# Altium PCB lcdRGB.PcbDoc
Units mm, origin at the board's own origin, x right, y up, seen from the top; angles counter-clockwise.
Board outline 87.25 x 52.83 mm, 2 copper layers (Top Layer, Bottom Layer); 14 components, 40 nets, 148 pads, 51 vias.
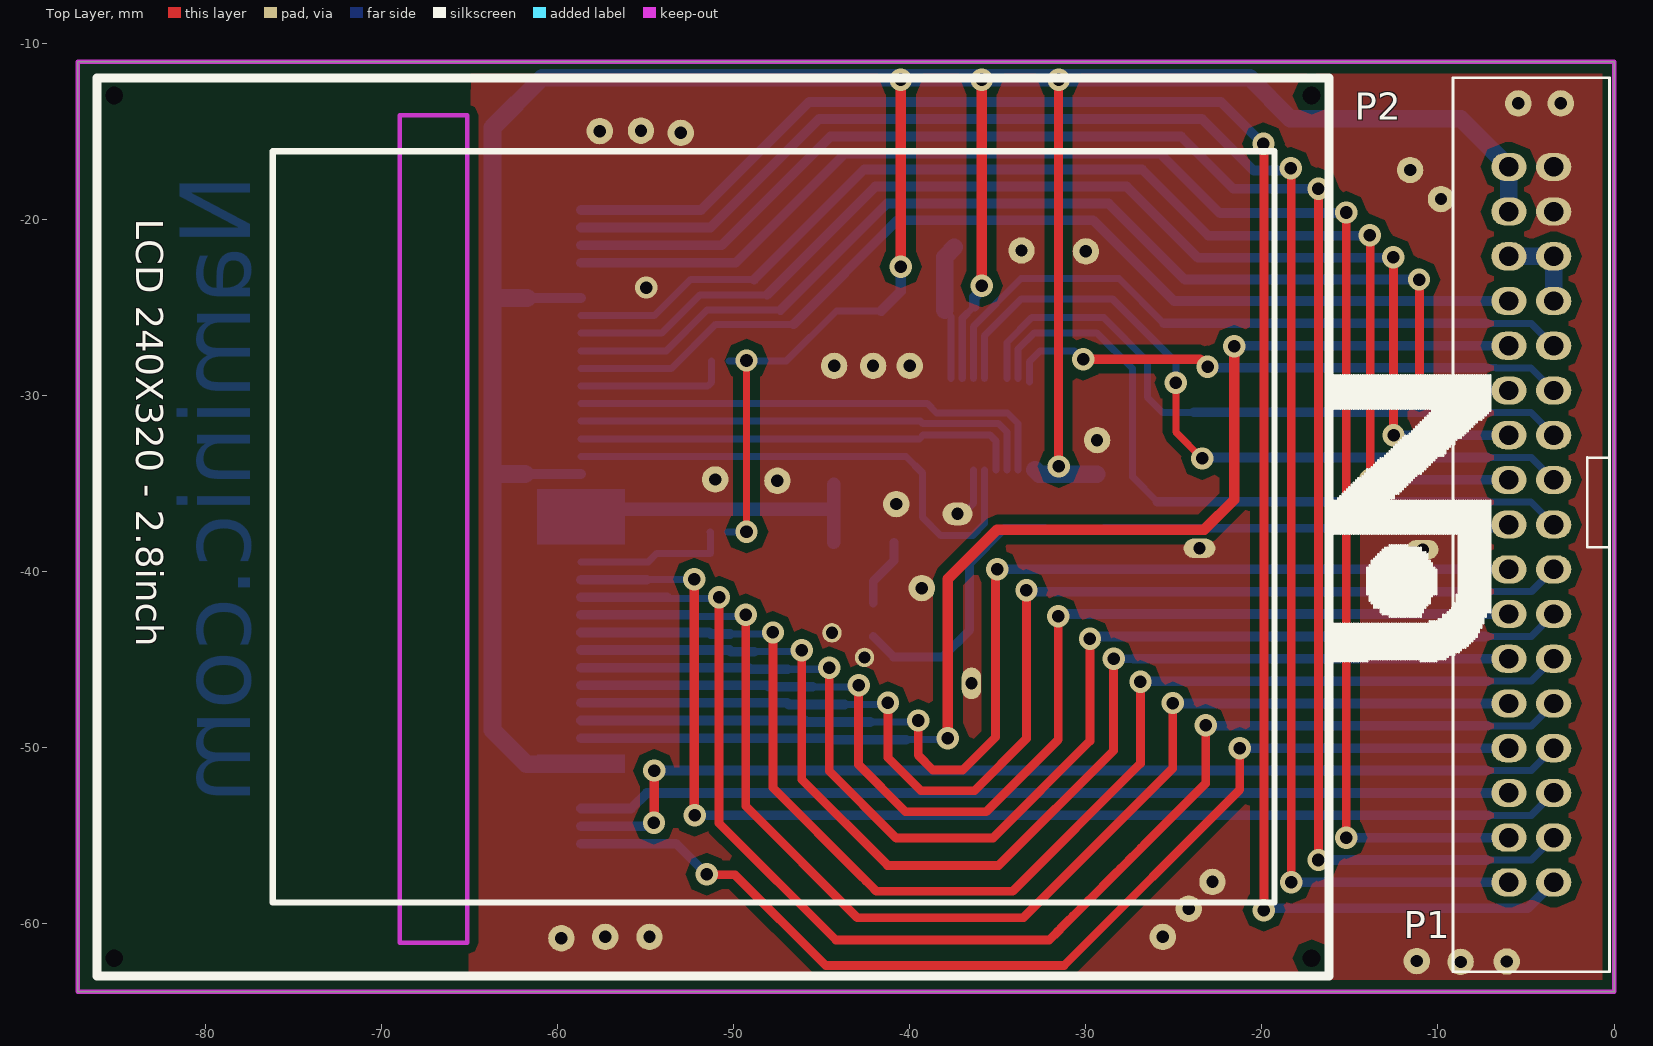
[diagram p0: Top Layer view]
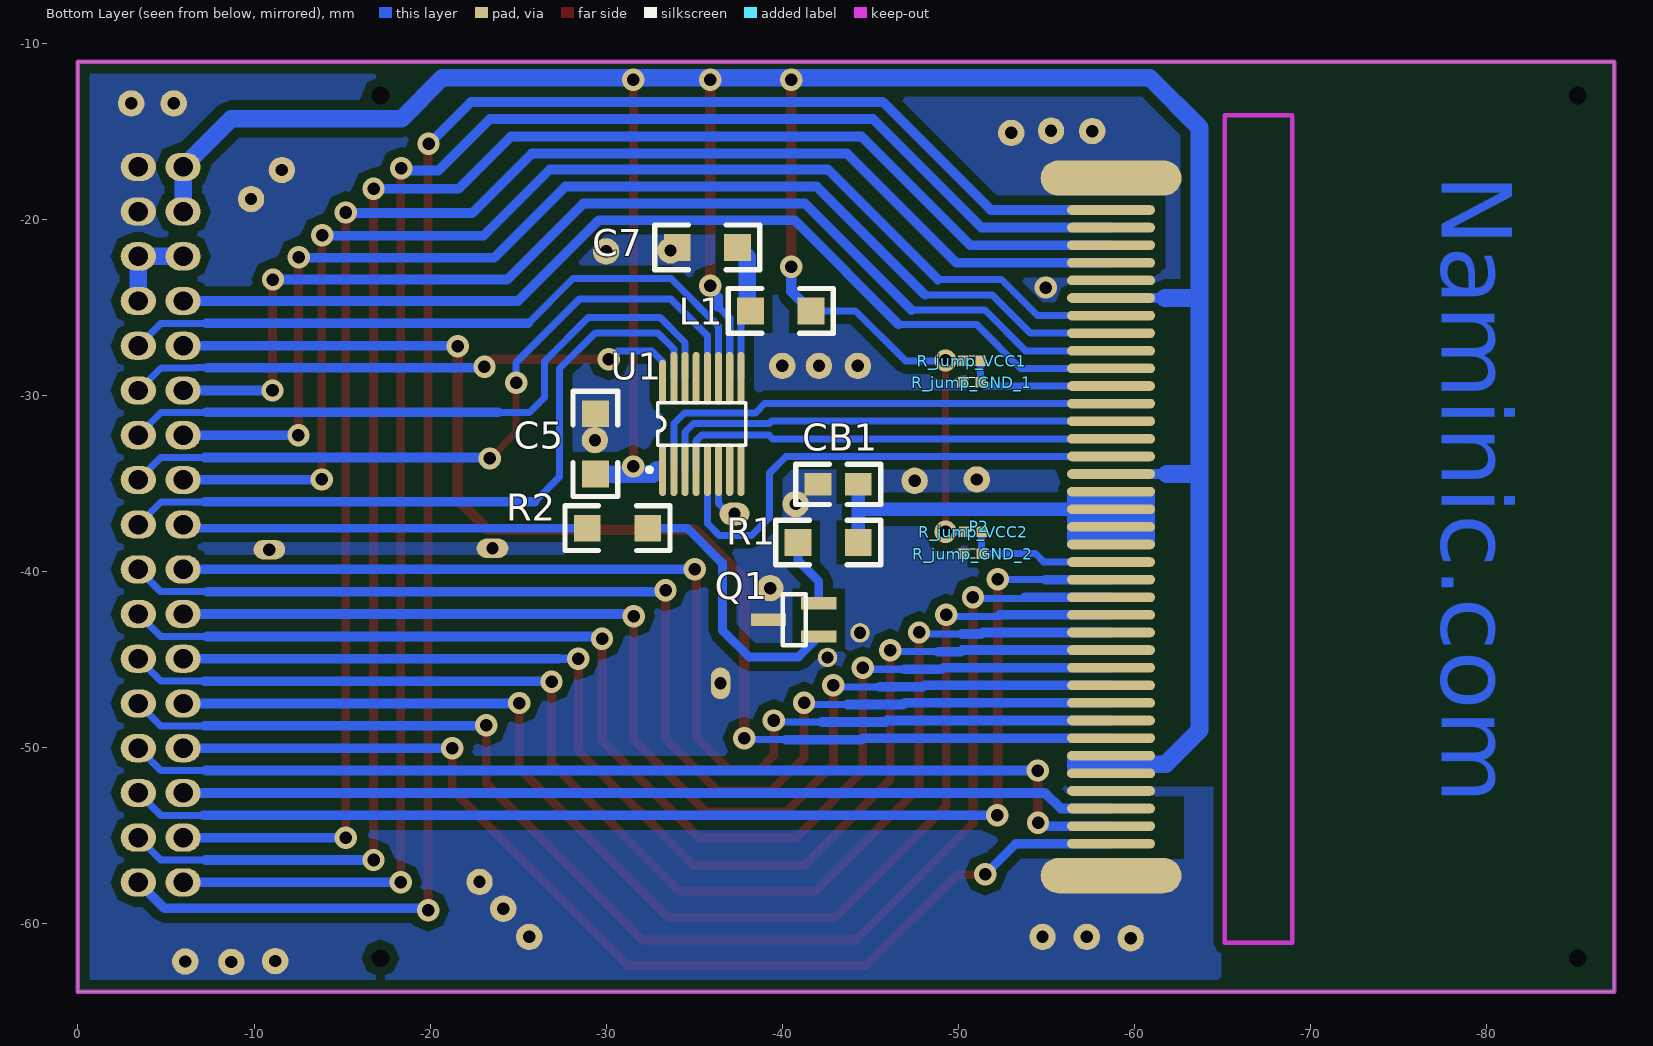
[diagram p1: Bottom Layer view, seen from below]

## Layer stack, top to bottom
Top Layer: signal copper 0.0356
Dielectric: dielectric 0.32, FR-4, Dk 4.8
Bottom Layer: signal copper 0.0356

## Board outline
-87.249,-11.049 0,-11.049 0,-63.881 -87.249,-63.881

## Design rules (kind name [scope] priority, off if disabled: settings)
Clearance [InPolygon] p1: gap=0.5
ComponentClearance [All] p1: gap=0.2 collisioncheckmode=3 verticalgap=0.2 showdistances=FALSE
FabricationTestpoint [(IsPad And (OnTopLayer Or OnBottomLayer))] p1: side=3 testpointundercomponent=TRUE minsize=1.016 maxsize=2.54 preferedsize=1.524 minholesize=0 maxholesize=1.016 preferedholesize=0.813 testpointgrid=0.025 allowsidetop=TRUE allowsidebottom=TRUE usegrid=TRUE gridtolerance=0
HoleSize [All] p1: absolutevalues=TRUE maxlimit=2.54 minlimit=0.7 maxpercent=80.000 minpercent=20.000
MinimumSolderMaskSliver [All] p1: minsoldermaskwidth=0
PlaneConnect [All] p1: planeconnectstyle=Direct reliefexpansion=0.508 reliefentries=4 reliefconductorwidth=0.254 reliefairgap=0.254
PolygonConnect [All] p1: connectstyle=Direct reliefconductorwidth=0.254 reliefentries=4 polygonreliefangle="90 Angle"
RoutingVias [All] p1: holewidth=0.711 width=1.27 viastyle="Through Hole" minholewidth=0.711 minwidth=1.27 maxholewidth=0.711 maxwidth=1.27
SilkToSilkClearance [All] p1: silktosilkclearance=0
SilkscreenOverComponentPads [IsPad] p1: minsilkscreentomaskgap=0
SolderMaskExpansion [All] p1: expansion=0
Width "Schematic Width Constraint_2" [InNet('+3.3A')] p1: maxlimit=1 minlimit=0.508 preferedwidth=0.508 minimp=50.000000 maximp=50.000000 favimp=50.000000
Width "Schematic Width Constraint_1" [InNet('EN')] p2: maxlimit=1 minlimit=0.508 preferedwidth=0.508 minimp=50.000000 maximp=50.000000 favimp=50.000000
Width "Schematic Width Constraint" [InNet('+5')] p3: maxlimit=1 minlimit=0.508 preferedwidth=0.508 minimp=50.000000 maximp=50.000000 favimp=50.000000
Width [All] p4: maxlimit=1 minlimit=0.4 preferedwidth=0.55 minimp=50.000000 maximp=50.000000 favimp=50.000000
21 further rules are at their usual default settings.

## Components (designator, comment, footprint, x,y, rotation, side; value= is the part's Value field where it differs from the comment)
C5 "100nF" 1206 -29.388,-34.468 r90 bottom
C7 "100nF" 1206 -37.465,-21.59 r0 bottom
CB1 "Circuit Breaker" 0805 -42.037,-35.052 r180 bottom
L1 "Inductor" 1206 -41.631,-25.197 r0 bottom
P1 "Header 17X2" IDC34S -3.429,-57.658 r180 top
P2 "TFT LCD" LCD_COLOR28 -51.181,-37.465 r270 top locked
Q1 "MMBT2907" SOT-23 -40.03,-44.196 r90 bottom
R1 "10R" 1206 -40.894,-38.354 r180 bottom
R2 "2.7K" 1206 -32.36,-37.541 r0 bottom
R_jump_GND_1 "0" "RES 0402 (1005X04L)" -50.775,-29.261 r180 bottom
R_jump_GND_2 "0" "RES 0402 (1005X04L)" -50.825,-38.989 r180 bottom
R_jump_VCC1 "0" "RES 0402 (1005X04L)" -50.775,-28.042 r180 bottom
R_jump_VCC2 "0" "RES 0402 (1005X04L)" -50.851,-37.744 r180 bottom
U1 "ADS7843E" DBQ016 -35.433,-31.623 r180 bottom

## Footprints (in the part's own frame and the unit in brackets; to place one, negate y for a bottom-side part, rotate by r counter-clockwise, add the part's x,y. Pads: shape width x height; smd on the part's side, far side on the other; paste and mask are expansions set on the pad)
0805 [mil]
  rect 60x50 smd: 1(0,0) 2(90,0)
  silkscreen extent -50,-45 140,45, body extent -16,-23 107,25, height 39
1206 [mil]
  rect 60x60 smd: 1(0,0) 2(135,0)
  silkscreen extent -50,-50 185,50
DBQ016 [mm] "SSOP; 16 Leads; Body Width 3.9 mm; Pitch 0.635 mm"
  oval 0.4x3 smd: 1(-2.222,-2.6) 2(-1.587,-2.6) 3(-0.952,-2.6) 4(-0.317,-2.6) 5(0.318,-2.6) 6(0.953,-2.6) 7(1.588,-2.6) 8(2.223,-2.6) 9(2.223,2.6) 10(1.588,2.6) 11(0.953,2.6) 12(0.318,2.6) 13(-0.317,2.6) 14(-0.952,2.6) 15(-1.587,2.6)
  oval 0.4x2.5 smd: 16(-2.222,2.4)
  silkscreen extent -3.1,-2.72 2.5,1.2
IDC34S [mm]
  oval 2x1.6 hole 1.1: 1(0,0) 2(2.54,0) 3(0,-2.54) 4(2.54,-2.54) 5(0,-5.08) 6(2.54,-5.08) 7(0,-7.62) 8(2.54,-7.62) 9(0,-10.16) 10(2.54,-10.16) 11(0,-12.7) 12(2.54,-12.7) 13(0,-15.24) 14(2.54,-15.24) 15(0,-17.78) 16(2.54,-17.78) 17(0,-20.32) 18(2.54,-20.32) 19(0,-22.86) 20(2.54,-22.86) 21(0,-25.4) 22(2.54,-25.4) 23(0,-27.94) 24(2.54,-27.94) 25(0,-30.48) 26(2.54,-30.48) 27(0,-33.02) 28(2.54,-33.02) 29(0,-35.56) 30(2.54,-35.56) 31(0,-38.1) 32(2.54,-38.1) 33(0,-40.64) 34(2.54,-40.64)
  silkscreen extent -3.18,-45.7 5.72,5.08
LCD_COLOR28 [mm]
  oval 2x8 smd far side: 0(-19.812,-7.5) 0(19.812,-7.5)
  oval 0.55x5 smd far side: 1(-18,-7.5) 2(-17,-7.5) 3(-16,-7.5) 4(-15,-7.5) 5(-14,-7.5) 6(-13,-7.5) 7(-12,-7.5) 8(-11,-7.5) 9(-10,-7.5) 10(-9,-7.5) 11(-8,-7.5) 12(-7,-7.5) 13(-6,-7.5) 14(-5,-7.5) 15(-4,-7.5) 16(-3,-7.5) 17(-2,-7.5) 18(-1,-7.5) 19(0,-7.5) 20(1,-7.5) 21(2,-7.5) 22(3,-7.5) 23(4,-7.5) 24(5,-7.5) 25(6,-7.5) 26(7,-7.5) 27(8,-7.5) 28(9,-7.5) 29(10,-7.5) 30(11,-7.5) 31(12,-7.5) 32(13,-7.5) 33(14,-7.5) 34(15,-7.5) 35(16,-7.5) 36(17,-7.5) 37(18,-7.5)
  round 0 hole 1: 38(24.5,34) 39(-24.5,-34) 40(24.5,-34) 41(-24.5,34)
  Keep-Out Layer lines w0.254: 23.622,-17.78 23.622,-13.97 -23.368,-13.97 -23.368,-17.78 -23.114,-17.78 23.622,-17.78
  silkscreen extent -25.5,-35 25.5,35
"RES 0402 (1005X04L)" [mm] "Chip Resistor, 2-Leads, Body 1.0x0.5mm, IPC High Density _ (0.031/0.063 W)"
  rect 0.6x0.6 smd: 1(-0.5,0) 2(0.5,0)
  silkscreen extent -0.15,-0.25 0.15,0.25, body extent -0.51,-0.25 0.51,0.25, height 0.35
SOT-23 [mm]
  rect 0.7x2 smd: 1(2.4,-2.05) 2(0.5,-2.05) 3(1.45,0.81)
  silkscreen extent 0,-1.3 2.9,0

## Part data
C5 C7: library part "Cap Semi", "Capacitor (Semiconductor SIM Model)"
P1: "Header, 17-Pin, Dual row"
P2: library part TFTLCD
Q1: library part 2N3906, "PNP General Purpose Amplifier"
R1 R2: library part "Res Semi", "Semiconductor Resistor"
R_jump_GND_1 R_jump_GND_2 R_jump_VCC1 R_jump_VCC2: library part Resistor, "Resistor"
U1: "4-Wire Touch Screen Controller, 16-Pin SSOP, Pb-Free"

## Free pads (board coordinates)
  round 1.5 hole 0.7: 24(-22.809,-57.633) 25(-24.155,-59.157) 26(-25.629,-60.757) 27(-11.201,-62.128) 28(-8.712,-62.179) 29(-6.096,-62.154) 30(-5.436,-13.411) 31(-3.023,-13.411) 32(-9.83,-18.847) 33(-11.582,-17.196) 34(-29.997,-21.819) 36(-57.607,-14.986) 37(-55.27,-14.961) 38(-53.01,-15.088) 39(-59.792,-60.833) 40(-57.302,-60.757) 41(-54.788,-60.757) 44(-39.319,-40.945) 45(-40.767,-36.17) 47(-29.362,-32.537) 48(-40.005,-28.321) 49(-42.088,-28.321) 50(-44.298,-28.321) 51(-47.523,-34.849) 52(-51.054,-34.773) 53(-33.655,-21.768)
  oval 1.7x1.3 hole 0.7: 46(-37.287,-36.728)
  oval 1.8x1.1 hole 0.7: 55(-23.546,-38.684) 55(-10.871,-38.76)
  oval 1.1x1.8 hole 0.7: 56(-36.5,-46.355)
  round 1.1 hole 0.7: 57(-42.57,-44.882) 58(-44.425,-43.485)

## Via types
v1: diameter 1.27, hole 0.711, Top Layer to Bottom Layer, tented both sides, 50 vias
v2: diameter 1.27, hole 0.711, Top Layer to Bottom Layer, 1 vias

## Nets (pads, with @x,y where several pads share a name; then routed paths per layer and width w, separated by ;. In a path a pad name is that pad's centre, name@x,y a point inside that pad or via, vN(x,y) a via of type N, cw(c..) or ccw(c..) an arc to the next point about the centre after c; other vN are vias at no path point)
+3.3: C5.1 L1.1 P1.32 P1.34 P2.6 P2.16 P2.32 P2.33 R_jump_VCC1.1 R_jump_VCC2.1 U1.1 U1.10 | length 191
  Top Layer w0.4: v1(-49.276,-37.744) v1(-49.276,-28.016)
  Top Layer w0.5: v1(-31.547,-34.036) v1(-31.547,-12.065)
  Top Layer w0.6: v1(-40.513,-22.682) v1(-40.513,-12.065) ; v1(-35.916,-23.774) v1(-35.916,-12.065)
  Bottom Layer w0.4: R_jump_VCC2.1 v1(-49.276,-37.744) ; R_jump_VCC1.1 -47.015,-28.042 -44.171,-25.197 L1.1 ; U1.10 -37.021,-25.616 -36.347,-24.943 ; v1(-35.916,-12.065) -35.916,-11.963 v1@-35.916,-11.836
  Bottom Layer w0.55: -61.849,-34.465 P2.16 ; -61.722,-24.465 P2.6
  Bottom Layer w0.6: L1.1 -40.513,-24.079 v1(-40.513,-22.682) ; -36.347,-24.943 -36.347,-24.435 -35.916,-24.003 v1(-35.916,-23.774)
  Bottom Layer w1: -61.849,-34.465 -63.703,-34.465 ; -61.722,-24.465 -63.632,-24.465 -63.703,-24.536 ; -58.75,-50.952 -61.773,-50.952 -63.703,-49.022 -63.703,-34.465 ; -32.892,-34.223 -32.647,-34.468 C5.1 ; P1.32 P1.34 -8.712,-14.275 -18.39,-14.275 -20.701,-11.963 -35.916,-11.963 -60.884,-11.963 -63.703,-14.783 -63.703,-24.536 ; -63.703,-34.465 -63.703,-24.536
+5: P1.27 P1.29 P1.30 | length 5.1
  Bottom Layer w1: P1.30 P1.29 P1.27
CS: P1.20 P2.7 | length 71.5
  Top Layer w0.5: v1(-13.868,-20.904) -13.843,-20.93 v1(-13.843,-34.773)
  Bottom Layer w0.4: P2.7 -54.497,-25.465 -52.451,-23.419 -48.844,-23.419
  Bottom Layer w0.55: -48.844,-23.419 -42.596,-17.17 -26.797,-17.17 -23.038,-20.93 v1@-13.868,-20.93 ; v1@-13.792,-34.798 P1.20
D0: P1.1 P2.1 | length 102.9
  Top Layer w0.5: v1(-19.914,-15.697) -19.888,-15.723 v1(-19.888,-59.233)
  Bottom Layer w0.55: P2.1 -51.85,-19.465 -45.72,-13.335 -22.327,-13.335 v1@-19.939,-15.723 ; v1@-19.888,-59.131 -4.902,-59.131 P1.1
D1: P1.2 P2.2 | length 97
  Top Layer w0.5: v1(-18.364,-17.094) -18.339,-17.12 v1(-18.339,-57.658)
  Bottom Layer w0.55: P2.2 -51.326,-20.465 -45.161,-14.3 -23.393,-14.3 -20.472,-17.221 v1@-18.364,-17.221 ; v1(-18.339,-57.658) P1.2
D2: P1.3 P2.3 | length 97.8
  Top Layer w0.5: v1(-16.789,-56.388) v1(-16.789,-18.263)
  Bottom Layer w0.4: -7.239,-56.388 -4.699,-56.388 P1.3
  Bottom Layer w0.55: P2.3 -50.675,-21.465 -44.501,-15.291 -24.587,-15.291 -21.615,-18.263 v1(-16.789,-18.263) ; v1@-16.866,-56.388 v1(-16.789,-56.388) -7.239,-56.388
D3: P1.4 P2.4 | length 92.3
  Top Layer w0.5: v1(-15.215,-55.118) v1(-15.215,-19.609)
  Bottom Layer w0.55: P2.4 -49.897,-22.465 -43.688,-16.256 -25.781,-16.256 -22.403,-19.634 v1@-15.215,-19.634 ; v1@-15.113,-55.118 v1(-15.215,-55.118) P1.4
D4: P1.5 P2.22 | length 68.8
  Top Layer w0.55: v1@-52.248,-53.442 v1(-52.248,-40.437)
  Bottom Layer w0.4: -54.94,-40.465 -52.276,-40.465 v1(-52.248,-40.437) ; -7.112,-53.848 -4.699,-53.848 P1.5
  Bottom Layer w0.55: P2.22 -54.94,-40.465 ; v1(-52.222,-53.848) -7.112,-53.848
D5: P1.6 P2.35 | length 53.1
  Bottom Layer w0.55: P2.35 -55.827,-53.465 -54.94,-52.578 P1.6
D6: P1.7 P2.36 | length 59.4
  Top Layer w0.55: v1(-54.534,-54.28) -54.534,-54.432 -54.508,-54.458 v1(-54.508,-51.308)
  Bottom Layer w0.4: -7.264,-51.308 -4.699,-51.308 P1.7
  Bottom Layer w0.55: P2.36 v1@-54.356,-54.465 ; v1@-54.534,-54.381 v1(-54.534,-54.28) ; v1(-54.508,-51.308) -7.264,-51.308
D7: P1.8 P2.37 | length 62.1
  Top Layer w0.5: v1@-51.537,-57.226 -49.936,-57.226 -44.78,-62.382 -31.242,-62.382 -21.26,-52.4 v1(-21.26,-50.038)
  Bottom Layer w0.5: -53.264,-55.465 v1(-51.537,-57.192) ; v1(-21.26,-50.038) v1@-20.803,-50.038
  Bottom Layer w0.55: P2.37 -53.264,-55.465 ; v1@-20.803,-50.038 P1.8
D8: P1.9 P2.23 | length 78.4
  Top Layer w0.5: v1(-50.838,-41.465) -50.838,-54.293 -44.196,-60.935 -32.087,-60.935 -31.606,-60.453 -31.313,-60.161 -31.02,-59.868 -30.727,-59.575 -30.434,-59.282 -30.141,-58.989 -29.848,-58.696 -28.324,-57.172 -28.031,-56.879 -27.738,-56.586 -27.446,-56.293 -27.153,-56.001 -26.86,-55.708 -26.567,-55.415 -23.19,-52.038 v1(-23.19,-48.743)
  Bottom Layer w0.4: -53.772,-41.465 -53.711,-41.526 -50.898,-41.526 v1(-50.838,-41.465) ; -7.188,-48.768 -4.699,-48.768 P1.9
  Bottom Layer w0.55: P2.23 -53.772,-41.465 ; v1@-23.19,-48.768 -7.188,-48.768
D9: P1.10 P2.24 | length 73.3
  Top Layer w0.5: v1(-49.323,-42.465) -49.323,-53.318 -42.977,-59.665 -33.548,-59.665 -25.07,-51.187 v1(-25.07,-47.473)
  Bottom Layer w0.4: -52.375,-42.465 -52.286,-42.554 -49.412,-42.554 v1(-49.323,-42.465)
  Bottom Layer w0.55: P2.24 -52.375,-42.465 ; v1@-24.892,-47.498 P1.10
D10: P1.11 P2.25 | length 74.7
  Top Layer w0.5: v1(-47.772,-43.465) -47.772,-52.289 -42.779,-57.282 -42.486,-57.575 -42.193,-57.868 -41.9,-58.161 -34.158,-58.161 -26.899,-50.902 v1(-26.899,-46.253)
  Bottom Layer w0.4: -51.384,-43.465 -51.295,-43.554 ; -50.216,-43.554 -47.861,-43.554 v1(-47.772,-43.465) ; -7.188,-46.228 -4.699,-46.228 P1.11
  Bottom Layer w0.55: P2.25 -51.384,-43.465 ; -51.295,-43.554 -50.216,-43.554 ; v1@-26.848,-46.228 -7.188,-46.228
D11: P1.12 P2.26 | length 70.1
  Top Layer w0.5: v1(-46.137,-44.465) -46.137,-51.816 -41.26,-56.693 -34.95,-56.693 -28.423,-50.165 v1(-28.423,-44.958)
  Bottom Layer w0.4: -50.241,-44.465 -50.152,-44.554 ; -48.844,-44.554 -46.226,-44.554 v1(-46.137,-44.465)
  Bottom Layer w0.5: v1(-28.423,-44.958) -27.305,-44.958
  Bottom Layer w0.55: P2.26 -50.241,-44.465 ; -50.152,-44.554 -48.844,-44.554 ; -27.305,-44.958 P1.12
D12: P1.13 P2.27 | length 71.2
  Top Layer w0.5: v1(-44.578,-45.465) -44.578,-51.333 -40.768,-55.143 -35.281,-55.143 -29.769,-49.632 v1(-29.769,-43.815)
  Bottom Layer w0.4: -49.149,-45.465 -49.06,-45.554 ; -46.939,-45.554 -44.667,-45.554 v1(-44.578,-45.465) ; -7.315,-43.688 -4.699,-43.688 P1.13
  Bottom Layer w0.55: P2.27 -49.149,-45.465 ; -49.06,-45.554 -46.939,-45.554 ; v1@-29.591,-43.688 -7.315,-43.688
D13: P1.14 P2.28 | length 67.1
  Top Layer w0.5: v1(-42.909,-46.465) -42.909,-50.978 -40.242,-53.645 -35.656,-53.645 -31.567,-49.555 v1(-31.567,-42.545)
  Bottom Layer w0.4: -48.082,-46.465 -47.993,-46.554 ; -45.517,-46.554 -42.998,-46.554 v1(-42.909,-46.465)
  Bottom Layer w0.55: P2.28 -48.082,-46.465 ; -47.993,-46.554 -45.517,-46.554 ; v1@-31.567,-42.418 P1.14
D14: P1.15 P2.29 | length 69.4
  Top Layer w0.5: v1(-41.242,-47.465) -41.242,-50.571 -39.362,-52.451 -36.322,-52.451 -33.376,-49.505 v1(-33.376,-41.072)
  Bottom Layer w0.4: -46.965,-47.465 -46.876,-47.554 ; -43.713,-47.554 -41.331,-47.554 v1(-41.242,-47.465) ; -7.341,-41.148 -4.699,-41.148 P1.15
  Bottom Layer w0.55: P2.29 -46.965,-47.465 ; -46.876,-47.554 -43.713,-47.554 ; v1@-33.376,-41.148 -7.341,-41.148
D15: P1.16 P2.30 | length 65.4
  Top Layer w0.5: v1(-39.524,-48.465) -39.524,-50.443 -38.684,-51.283 -37.008,-51.283 -35.128,-49.403 -35.128,-39.878 v1(-35.027,-39.878)
  Bottom Layer w0.4: -45.949,-48.465 -45.86,-48.554 ; -42.24,-48.554 -39.613,-48.554 v1(-39.524,-48.465)
  Bottom Layer w0.55: P2.30 -45.949,-48.465 ; -45.86,-48.554 -42.24,-48.554 ; v1(-35.027,-39.878) P1.16
EN: CB1.2 P2.17 P2.18 P2.19 P2.20 R1.2 | length 17.7
  Bottom Layer w0.762: P2.18 -44.434,-36.465 -44.323,-36.576 ; R1.2 -44.323,-36.576 ; CB1.2 -44.323,-36.576
GND: C5.2 C7.2 CB1.1 P1.31 P1.33 P2.0 P2.5 P2.34 pad.24 pad.25 pad.26 pad.27 pad.28 pad.29 pad.30 pad.31 pad.32 pad.33 pad.34 pad.36 pad.37 pad.38 pad.39 pad.40 pad.41 pad.44 pad.45 pad.46 pad.47 pad.48 pad.49 pad.50 pad.51 pad.52 pad.53 pad.55 pad.56 pad.57 pad.58 Q1.3 R_jump_GND_1.1 R_jump_GND_2.1 U1.6 | length 3.1
  Bottom Layer w0.4: pad.46 -36.982,-36.728 -36.386,-36.131 U1.6
  other v2: -54.966,-23.872
INT: P1.25 U1.11 | length 38.6
  Bottom Layer w0.4: U1.11 -36.386,-26.073 -33.68,-23.368 -28.118,-23.368 -25.578,-25.908 ; -7.29,-25.908 -4.699,-25.908 P1.25
  Bottom Layer w0.55: -25.578,-25.908 -7.29,-25.908
MISO: P1.19 U1.12 | length 42.2
  Top Layer w0.4: v1(-24.892,-29.286) -24.892,-32.08 v1(-23.393,-33.579)
  Bottom Layer w0.4: U1.12 -35.751,-26.607 -33.655,-24.511 -28.499,-24.511 -24.892,-28.118 v1(-24.892,-29.286) ; -7.214,-33.528 -4.699,-33.528 P1.19
  Bottom Layer w0.55: v1@-23.393,-33.528 -7.214,-33.528
MOSI: P1.21 U1.14 | length 37.6
  Bottom Layer w0.4: U1.14 -34.481,-26.988 -33.071,-25.578 -28.981,-25.578 -26.492,-28.067 -26.492,-30.124 -25.654,-30.963 -23.876,-30.963 ; -7.29,-30.963 -6.698,-30.963 -6.688,-30.972 -4.715,-30.972 P1.21
  Bottom Layer w0.55: -23.876,-30.963 -7.29,-30.963
NetC7_1: C7.1 L1.2 U1.9 | length 7.8
  Bottom Layer w0.4: L1.2@-38.024,-25.146 -37.656,-25.514 U1.9
  Bottom Layer w1: L1.2@-38.024,-25.146 -38.024,-22.149 C7.1
NetP2_11: P2.11 R_jump_GND_1.2 R_jump_VCC1.2 | length 8.7
  Bottom Layer w0.4: P2.11 -51.479,-29.465 R_jump_GND_1.2 R_jump_VCC1.2
NetP2_21: P2.21 R_jump_GND_2.2 R_jump_VCC2.2 | length 8.8
  Bottom Layer w0.4: P2.21 -54.857,-39.465 -54.381,-38.989 R_jump_GND_2.2 -51.325,-37.77 R_jump_VCC2.2
NetQ1_1: Q1.1 R1.1 | length 3.9
  Bottom Layer w0.5: Q1.1 -42.08,-40.556 -40.894,-39.37 R1.1
NetQ1_2: Q1.2 R2.1 | length 15.5
  Bottom Layer w0.5: Q1.2 -40.92,-44.856 -38.125,-44.856 -36.601,-43.332 -36.601,-39.522 -34.62,-37.541 R2.1
PWM: P1.18 R2.2 | length 22.8
  Bottom Layer w0.5: R2.2 P1.18@-6.172,-37.541
RD: P1.28 P2.10 | length 58.1
  Bottom Layer w0.4: P2.10 -53.535,-28.465 -51.029,-25.959 -46.609,-25.959
  Bottom Layer w0.55: -46.609,-25.959 -40.691,-20.041 -29.591,-20.041 -24.994,-24.638 P1.28
RESET: P1.26 P2.31 | length 72.4
  Top Layer w0.6: v1(-37.835,-49.465) -37.835,-40.426 -35.027,-37.617 -23.266,-37.617 -21.565,-35.916 v1(-21.565,-27.203)
  Bottom Layer w0.4: -44.577,-49.465 -44.488,-49.554 ; -40.208,-49.554 -37.924,-49.554 v1(-37.835,-49.465)
  Bottom Layer w0.55: P2.31 -44.577,-49.465 ; -44.488,-49.554 -40.208,-49.554 ; v1@-21.565,-27.178 P1.26
RS: P1.22 P2.8 | length 67.9
  Top Layer w0.5: v1(-12.548,-22.149) -12.522,-22.174 v1(-12.522,-32.258)
  Bottom Layer w0.4: P2.8 -54.1,-26.465 -51.918,-24.282 -48.108,-24.282
  Bottom Layer w0.55: -48.108,-24.282 -41.961,-18.136 -27.686,-18.136 -23.647,-22.174 v1@-12.548,-22.174 ; v1(-12.522,-32.258) P1.22
SCK: P1.23 U1.16 | length 31.4
  Top Layer w0.55: v1(-30.15,-27.94) -23.52,-27.94 v1(-23.089,-28.372)
  Bottom Layer w0.4: U1.16 -33.211,-28.08 -32.614,-27.483 -30.658,-27.483 ; -7.341,-28.423 -6.698,-28.423 -6.688,-28.432 -4.715,-28.432 P1.23
  Bottom Layer w0.55: v1@-23.089,-28.423 -7.341,-28.423
TCS: P1.17 U1.15 | length 40.6
  Bottom Layer w0.4: U1.15 -33.846,-27.369 -32.918,-26.441 -29.388,-26.441 -27.356,-28.473 -27.356,-34.62 -25.933,-36.043 ; -7.214,-36.043 -6.698,-36.043 -6.688,-36.052 -4.715,-36.052 P1.17
  Bottom Layer w0.55: -25.933,-36.043 -7.214,-36.043
WR: P1.24 P2.9 | length 64.3
  Top Layer w0.5: v1(-11.074,-23.419) -11.049,-23.444 v1(-11.049,-29.718)
  Bottom Layer w0.4: P2.9 -53.83,-27.465 -51.511,-25.146 -47.346,-25.146 -47.396,-25.197
  Bottom Layer w0.55: -47.346,-25.146 -41.3,-19.101 -28.702,-19.101 -24.384,-23.419 v1(-11.074,-23.419) ; v1(-11.049,-29.718) P1.24
X+: P2.12 U1.2 | length 27.9
  Bottom Layer w0.4: P2.12 -39.004,-30.465 -38.481,-30.988 -34.442,-30.988 -33.846,-31.585 U1.2
X-: P2.14 U1.4 | length 25.4
  Bottom Layer w0.4: P2.14 -39.45,-32.465 -39.243,-32.258 -35.433,-32.258 -35.116,-32.575 U1.4
Y+: P2.13 U1.3 | length 26.6
  Bottom Layer w0.4: P2.13 -39.401,-31.465 -39.278,-31.588 -34.96,-31.588 -34.481,-32.067 U1.3
Y-: P2.15 U1.5 | length 29.6
  Bottom Layer w0.4: P2.15 -40.22,-33.465 -39.268,-34.417 -39.268,-36.932 -38.252,-37.948 -36.424,-37.948 -35.751,-37.275 U1.5
pads on no net: P2.38 P2.39 P2.40 P2.41 U1.7 U1.8 U1.13

## Polygon pours and split planes (outlines as drawn)
GND on Bottom Layer "Bot" (solid, remove dead copper, pour order 2): -87.249,-11.049 0,-11.049 0,-63.881 -87.249,-63.881
GND on Top Layer "Top" (solid, remove dead copper, pour order 4): -87.249,-11.049 0,-11.049 0,-63.881 -87.249,-63.881

## Keep-outs
Keep-Out Layer:
  the board outline again, w0.254

## Other copper
Top Layer:
  pour cut-out: -64.922,-10.82 -65.151,-11.049 -87.249,-11.049 -87.249,-63.881 -65.047,-63.881
Bottom Layer:
  rectangle net EN: -61.163,-38.465 -56.185,-35.306
  rectangle net +3.3: -61.163,-51.46 -56.185,-50.394
  pour cut-out: -64.823,-10.719 -65.052,-10.947 -87.15,-10.947 -87.15,-63.779 -64.948,-63.779
  pour cut-out: -61.062,-52.222 -64.491,-52.222 -64.491,-49.886 -64.389,-49.987 -62.738,-49.987 -62.738,-51.41 -62.687,-51.46 -62.662,-51.435 -61.112,-51.435
  pour cut-out: -60.656,-52.756 -62.84,-52.756 -62.89,-52.807 -62.84,-52.857 -62.84,-56.337 -60.807,-56.337 -60.656,-56.337
  pour cut-out: -60.906,-18.626 -60.906,-23.304 -60.906,-23.037 -61.088,-23.037 -61.798,-22.809 -61.798,-18.644
  text "Naminic.com" at -77.47,-17.45 h4 r90

## Silkscreen, mask and mechanical layers (free items; w line width, h text height)
Top Overlay:
  drawing of 248 lines, arcs and shapes, not listed

## Text inside footprints (layer, text, board x,y; h text height)
P2: Top Overlay "LCD 240X320 - 2.8inch" at -83.931,-19.965 h1.52 r270